# Altium PCB Dashboard.PcbDoc (part 1 of 2)
Units mil, origin at the board's own origin, x right, y up, seen from the top; angles counter-clockwise.
Board outline 4688.5 x 2701.18 mil, 2 copper layers (Top Layer, Bottom Layer); 92 components, 123 nets, 384 pads, 213 vias.
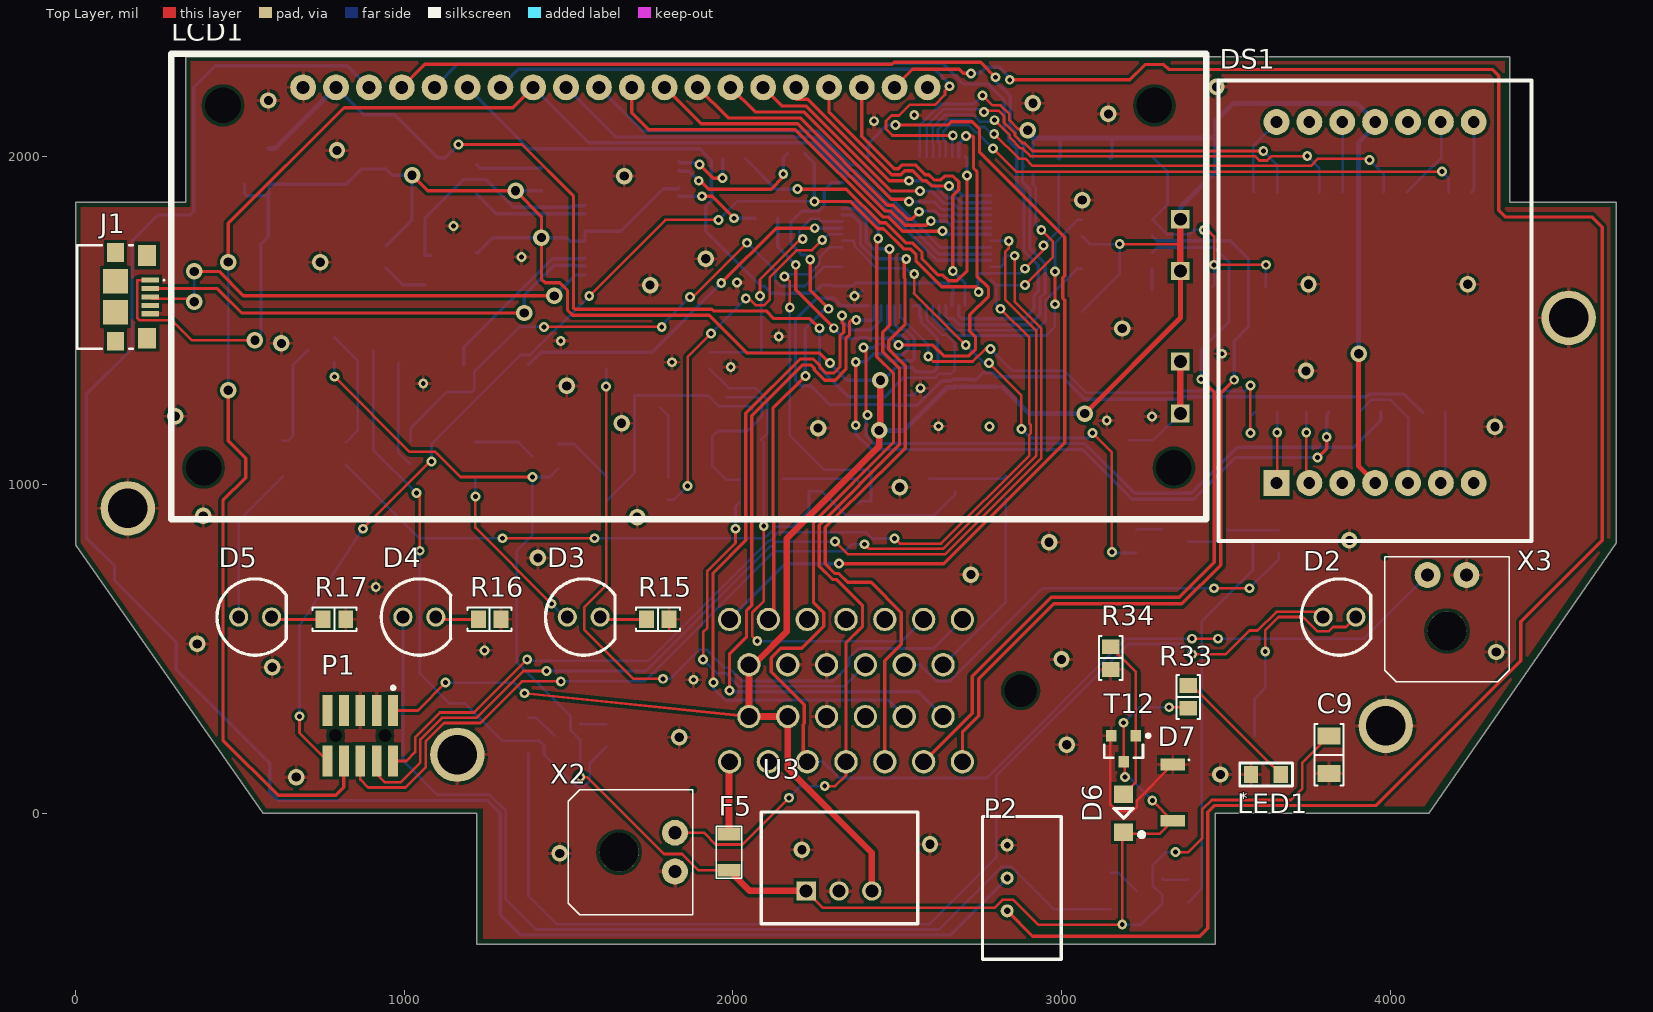
[diagram p0: Top Layer view]
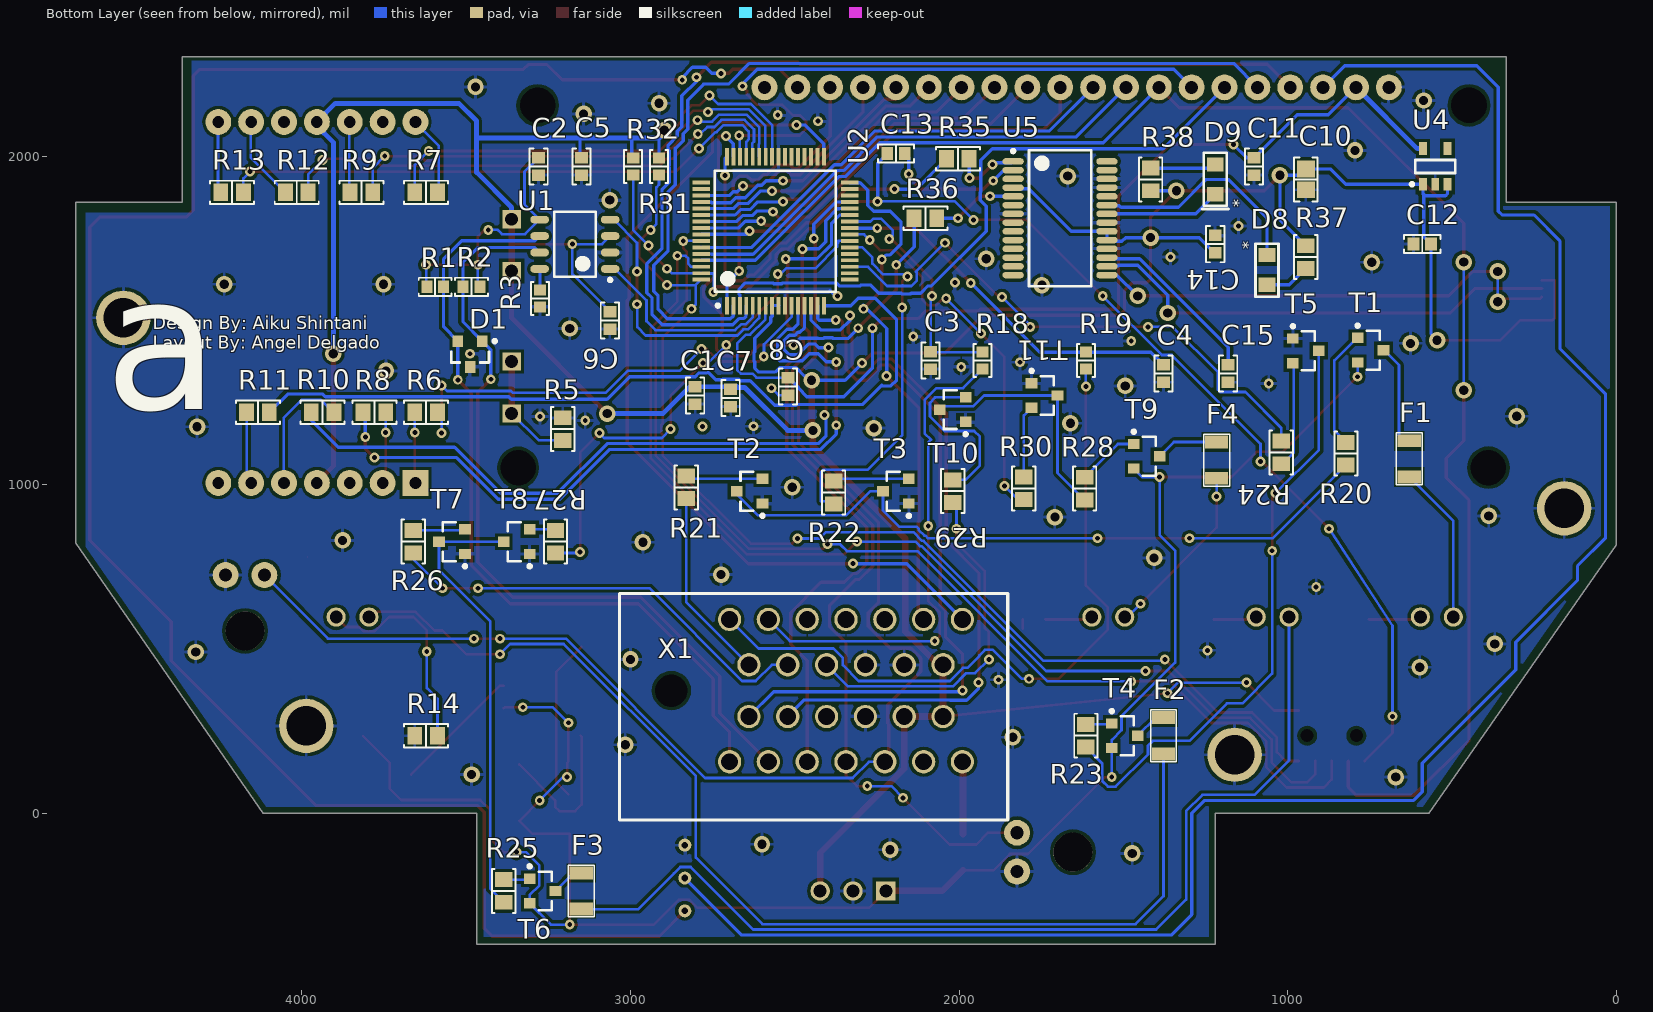
[diagram p1: Bottom Layer view, seen from below]
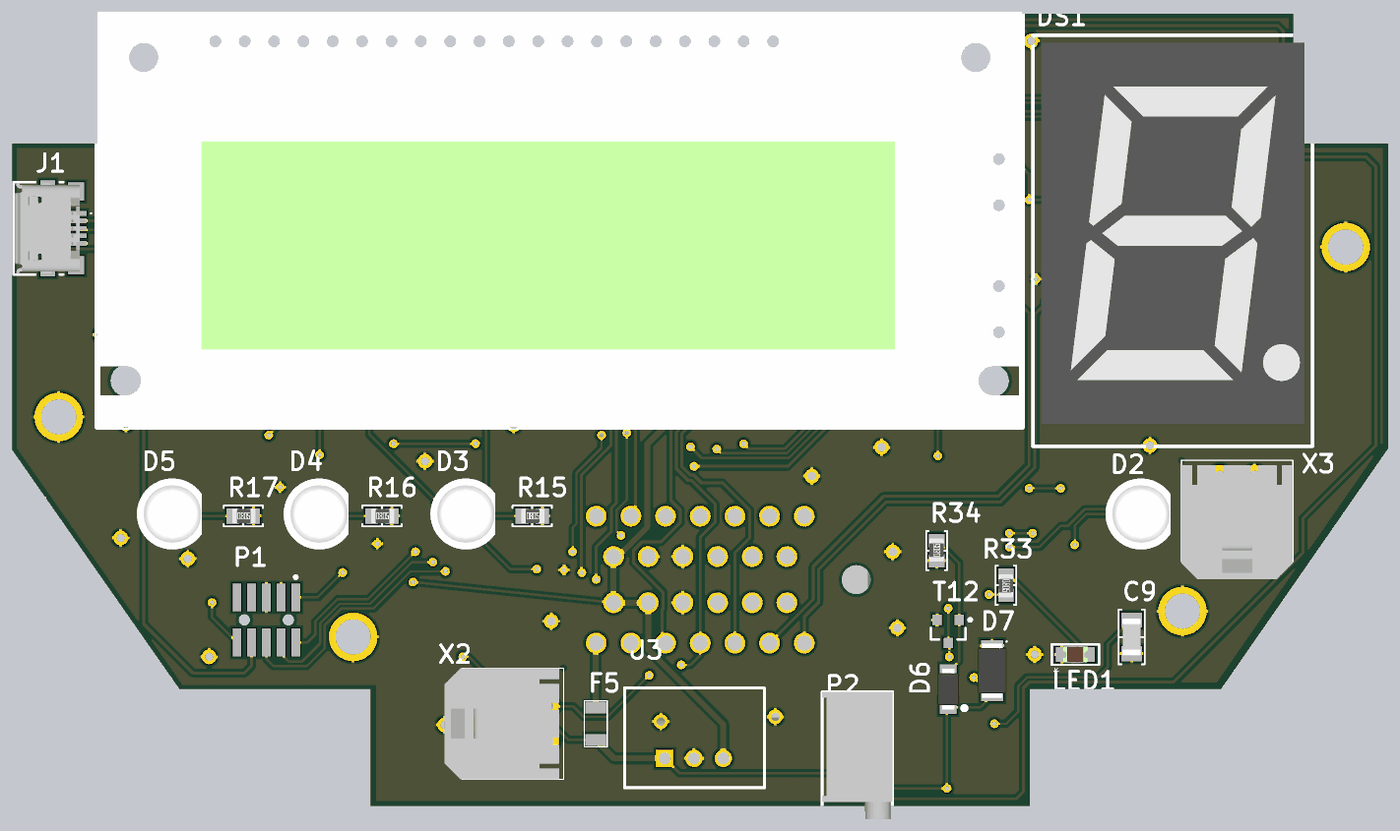
[diagram p3: 3D render of the assembled board from above, using the file's embedded part models]
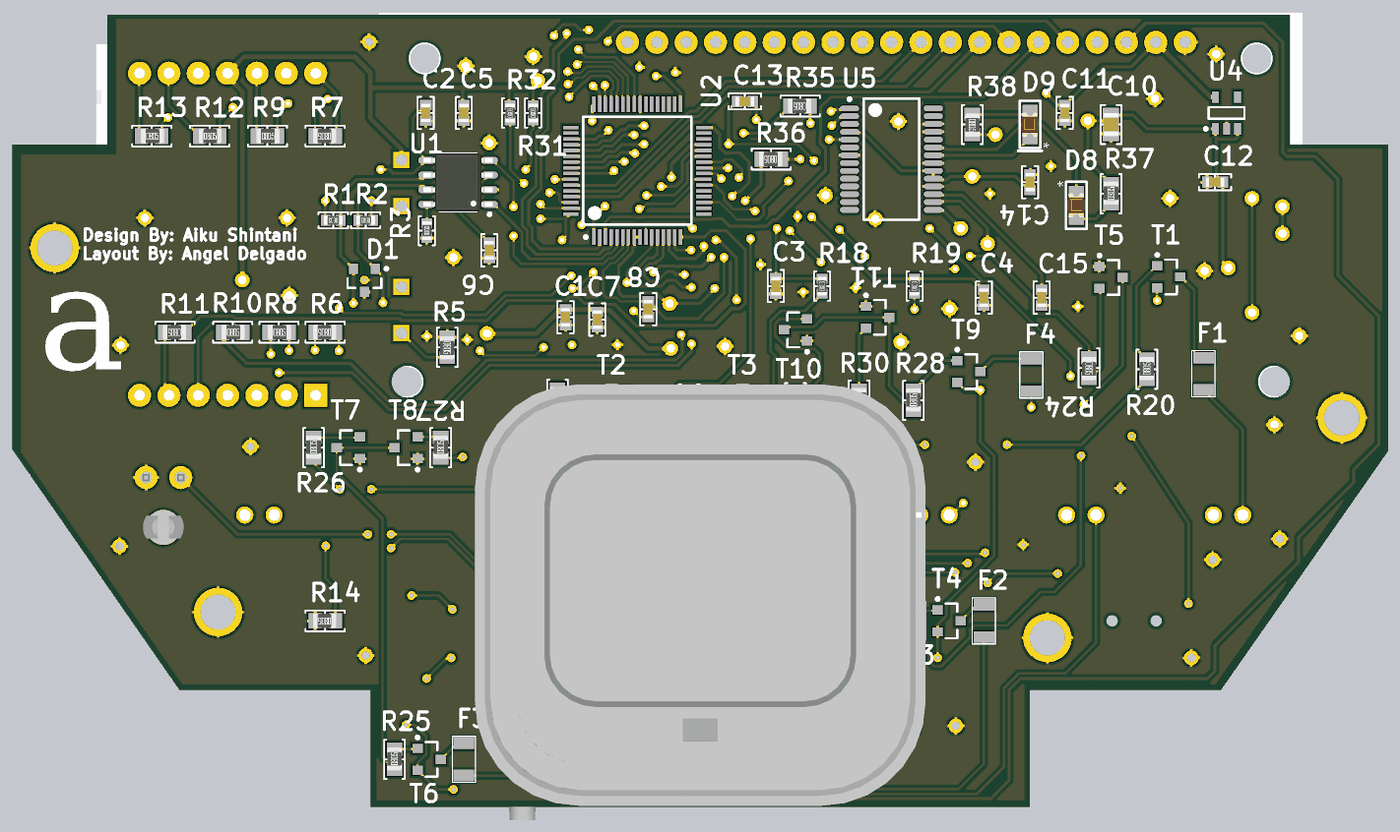
[diagram p4: 3D render of the assembled board from below, using the file's embedded part models]

## Layer stack, top to bottom
Top Solder: solder mask 0.4, Solder Resist, Dk 3.5
Top Layer: signal copper 1.4
Dielectric 1: dielectric 12.6, FR-4, Dk 4.8
Bottom Layer: signal copper 1.4
Bottom Solder: solder mask 0.4, Solder Resist, Dk 3.5

## Board outline
1220.87,0 1220.87,-398.03 3467.72,-398.03 3467.72,0 4117.8,0 4688.5,822.46 4688.5,1860.24 4364.17,1860.24 4364.17,2303.15 334.65,2303.15 334.65,1860.24 0,1860.24 0,816.93 570.87,0

## Design rules (kind name [scope] priority, off if disabled: settings)
Clearance [All] p1: gap=10 ignorepadtopadclearanceinfootprint=FALSE except(0: Arc-Hole Track-Hole SMDPad-Hole THPad-Hole Via-Hole Fill-Hole Poly-Hole Region-Hole Text-Hole; 6: SMDPad-SMDPad; 8: Arc-Arc Arc-Track Arc-SMDPad Track-Track Track-SMDPad)
ComponentClearance [All] p1: gap=10 collisioncheckmode=3 verticalgap=10 showdistances=TRUE
DiffPairsRouting [All] p1: maxlimit=10 minlimit=10 mostfreqgap=10 toplayer_minwidth=8 toplayer_maxwidth=15 toplayer_prefwidth=10 bottomlayer_minwidth=8 bottomlayer_maxwidth=15 bottomlayer_prefwidth=10 maxuncoupledlength=500
HoleSize [All] p1: absolutevalues=TRUE maxlimit=100 minlimit=10 maxpercent=80.000 minpercent=20.000
MatchedLengths "Schematic Matched Net Lengths_1" [InNet('CAN_N')] p1: tolerance=1000 checknetsindiffpair=FALSE checkdiffpairvsdiffpair=TRUE checkxsignals=TRUE checkothers=TRUE
MatchedLengths "Schematic Matched Net Lengths" [InNet('CAN_P')] p2: tolerance=1000 checknetsindiffpair=FALSE checkdiffpairvsdiffpair=TRUE checkxsignals=TRUE checkothers=TRUE
PolygonConnect [All] p1: connectstyle=Relief reliefconductorwidth=10 reliefentries=4 polygonreliefangle="90 Angle" airgapwidth=10
RoutingVias [All] p1: holewidth=28 width=50 viastyle="Through Hole" minholewidth=10 minwidth=10 maxholewidth=28 maxwidth=50
SolderMaskExpansion [All] p1: expansion=4
Width [All] p1: maxlimit=157.48 minlimit=8 preferedwidth=8 minimp=50.000000 maximp=50.000000 favimp=50.000000
27 further rules are at their usual default settings.

## Classes and differential pairs
component class USB: C13 C14 C15 D8 D9 J1 R35 R36 R37 R38 U5
component class U_RVP_OVP_LC: D6 D7 LED1 R33 R34 T12
component class U_Power: C9 C10 C11 C12 U3 U4
component class "U_High Side Drivers": F1 F2 F3 F4 R20 R21 R22 R23 R24 R25 R26 R27 R28 R29 R30 T1 T2 T3 T4 T5 T6 T7 T8 T9 T10 T11
component class U_DRS_POT_LPFs: C3 C4 R18 R19
component class U_CAN_Tranceiver: C1 C2 D1 R1 R2 R3 U1
component class MCU: C5 C6 C7 C8 P1 R31 R32 U2
component class MCU_System: F5
component class Dashboard: D2 D3 D4 D5 DS1 LCD1 P2 R5 R6 R7 R8 R9 R10 R11 R12 R13 R14 R15 R16 R17 X1 X2 X3
differential pair CAN: +CAN_P -CAN_N

## Components (designator, comment, footprint, x,y, rotation, side; value= is the part's Value field where it differs from the comment)
C1 "Capacitor MLCC 0.10uf 50V CAP 0603/1608" "CAP 0603/1608" 2803.15,1271.65 r90 bottom value=0.10uf
C2 "Capacitor MLCC 4700pf 50V CAP 0603/1608" "CAP 0603/1608" 3279.53,1968.5 r90 bottom value=4700pf
C3 "Capacitor MLCC 0.33uf 16V CAP 0603/1608" "CAP 0603/1608" 2086.61,1377.95 r90 bottom value=0.33uf (schematic designator C14)
C4 "Capacitor MLCC 0.33uf 16V CAP 0603/1608" "CAP 0603/1608" 1377.95,1338.58 r90 bottom value=0.33uf (schematic designator C15)
C5 "Capacitor MLCC 0.10uf 16V CAP 0603/1608" "CAP 0603/1608" 3149.61,1968.5 r90 bottom value=0.10uf (schematic designator C3)
C6 "Capacitor MLCC 0.10uf 25V CAP 0603/1608" "CAP 0603/1608" 3062.99,1500 r90 bottom value=0.10uf (schematic designator C4)
C7 "Capacitor MLCC 100pf 25V CAP 0603/1608" "CAP 0603/1608" 2695.15,1263.78 r90 bottom value=100pf (schematic designator C5)
C8 "Capacitor MLCC 0.10uf 25V CAP 0603/1608" "CAP 0603/1608" 2521.42,1299.21 r90 bottom value=0.10uf (schematic designator C6)
C9 "Capacitor MLCC 1.1pf 50V CAP 1206/3216" "CAP 1206/3216 - 1.8MM" 3813.98,178.15 r90 top value=10uf (schematic designator C7)
C10 "Capacitor MLCC 22uf 16V CAP 0805/2012" "CAP 0805/2012" 944.88,1929.13 r90 bottom value=22uf (schematic designator C8)
C11 "Capacitor MLCC 1.0uf 16V CAP 0603/1608" "CAP 0603/1608" 1102.36,1968.5 r90 bottom value=1.0uf (schematic designator C9)
C12 "Capacitor MLCC 1.0uf 16V CAP 0603/1608" "CAP 0603/1608" 590.55,1732.28 r180 bottom value=1.0uf (schematic designator C10)
C13 "Capacitor MLCC 0.10uf 25V CAP 0603/1608" "CAP 0603/1608" 2192.28,2007.87 r0 bottom value=0.10uf (schematic designator C11)
C14 "Capacitor MLCC 0.10uf 25V CAP 0603/1608" "CAP 0603/1608" 1220.47,1732.28 r270 bottom value=0.10uf (schematic designator C12)
C15 "Capacitor MLCC 0.10uf 25V CAP 0603/1608" "CAP 0603/1608" 1181.1,1338.58 r90 bottom value=0.10uf (schematic designator C13)
D1 "NUP1105LT1G" "SOT-23 (TO-236)" 3488.19,1397.64 r270 bottom value=TVS_24V
D2 "LED" "LED TH" 3845.98,597.36 r0 top locked value=Green
D3 "LED" "LED TH" 1545.98,597.36 r0 top locked value=Red
D4 "LED" "LED TH" 1045.98,597.36 r0 top locked value=Red
D5 "LED" "LED TH" 545.98,597.36 r0 top locked value=Red
D6 "DDZ9701-7" SOD123F 3188.98,0 r270 top value=14Vz
D7 "DIODE" SOD-128 3338.58,62.99 r270 top value=5A
D8 "" 0805_LED 1062.99,1653.54 r90 bottom value=Green
D9 "" 0805_LED 1220.47,1929.13 r270 bottom value=Red
DS1 "NAR105B" Stanley7Seg 3654.45,1005.51 r0 top locked
F1 "1A" "PTC Fuse 1206/3216" 629.92,1078.74 r90 bottom
F2 "1A" "PTC Fuse 1206/3216" 1377.95,236.22 r90 bottom
F3 "1A" "PTC Fuse 1206/3216" 3149.61,-236.22 r90 bottom
F4 "1A" "PTC Fuse 1206/3216" 1216.54,1074.8 r90 bottom
F5 "2.2A" "PTC Fuse 1206/3216" 1988.19,-118.11 r270 top
J1 "1981568-1" TECO-1981568-5_V 226.38,1571.54 r270 top value=CONN
LCD1 "" NHD-12232 3282.87,2154.33 r0 top locked value="LCD Display"
LED1 "" 0805_LED 3622.05,118.11 r180 top value=Green
P1 "5103309-1" HDR2X5_SMT 866.14,236.22 r180 top value=CONN
P2 "3299X-1-502LF" 3299X-1-502LF 2834.65,-196.85 r0 top value=5K
R1 "Resistor 62 0603 1/10W 5%" "RES 0603/1608" 3594.49,1602.36 r0 bottom value=62
R2 "Resistor 62 0603 1/10W 5%" "RES 0603/1608" 3484.25,1602.36 r0 bottom value=62
R3 "Resistor 100 0603 1/10W 10%" "RES 0603/1608" 3275.59,1566.93 r90 bottom value=100
R5 "Resistor 5.6 0805 1/2W 1%" "RES 0805/2012" 3206.24,1169.29 r270 bottom value=5.6
R6 "Resistor 82 0805 1/4W 5%" "RES 0805/2012" 3622.05,1220.47 r0 bottom value=82
R7 "Resistor 82 0805 1/4W 5%" "RES 0805/2012" 3622.05,1889.76 r0 bottom value=82
R8 "Resistor 82 0805 1/4W 5%" "RES 0805/2012" 3779.53,1220.47 r180 bottom value=82
R9 "Resistor 82 0805 1/4W 5%" "RES 0805/2012" 3818.9,1889.76 r180 bottom value=82
R10 "Resistor 82 0805 1/4W 5%" "RES 0805/2012" 3937.01,1220.47 r180 bottom value=82
R11 "Resistor 82 0805 1/4W 5%" "RES 0805/2012" 4133.86,1220.47 r0 bottom value=82
R12 "Resistor 82 0805 1/4W 5%" "RES 0805/2012" 4015.75,1889.76 r180 bottom value=82
R13 "Resistor 82 0805 1/4W 5%" "RES 0805/2012" 4212.6,1889.76 r180 bottom value=82
R14 "Resistor 330 0805 1/4W 5%" "RES 0805/2012" 3622.05,236.22 r0 bottom value=330
R15 "Resistor 1.0k 0805 1/4W 5%" "RES 0805/2012" 1771.65,590.55 r0 top value=1.0k
R16 "Resistor 1.0k 0805 1/4W 5%" "RES 0805/2012" 1259.84,590.55 r0 top value=1.0k
R17 "Resistor 1.0k 0805 1/4W 5%" "RES 0805/2012" 787.4,590.55 r0 top value=1.0k
R18 "Resistor 100k 0603 1/10W 1%" "RES 0603/1608" 1929.13,1377.95 r90 bottom value=100k (schematic designator R70)
R19 "Resistor 100k 0603 1/10W 1%" "RES 0603/1608" 1614.17,1377.95 r90 bottom value=100k (schematic designator R71)
R20 "Resistor 10k 0805 1/4W 5%" "RES 0805/2012" 822.83,1094.49 r90 bottom value=10k (schematic designator R18)
R21 "Resistor 120k 0805 1/4W 1%" "RES 0805/2012" 2830.71,992.13 r90 bottom value=120k (schematic designator R19)
R22 "Resistor 47k 0805 1/4W 1%" "RES 0805/2012" 2381.89,976.38 r90 bottom value=47k (schematic designator R20)
R23 "Resistor 10k 0805 1/4W 5%" "RES 0805/2012" 1614.17,236.22 r90 bottom value=10k (schematic designator R21)
R24 "Resistor 16k 0805 1/4W 1%" "RES 0805/2012" 1019.68,1098.43 r270 bottom value=16k (schematic designator R22)
R25 "Resistor 10k 0805 1/4W 5%" "RES 0805/2012" 3385.83,-236.22 r90 bottom value=10k (schematic designator R23)
R26 "Resistor 120k 0805 1/4W 1%" "RES 0805/2012" 3661.42,826.77 r90 bottom value=120k (schematic designator R24)
R27 "Resistor 47k 0805 1/4W 1%" "RES 0805/2012" 3228.35,826.77 r90 bottom value=47k (schematic designator R25)
R28 "Resistor 10k 0805 1/4W 5%" "RES 0805/2012" 1618.11,988.19 r90 bottom value=10k (schematic designator R26)
R29 "Resistor 120k 0805 1/4W 1%" "RES 0805/2012" 2019.68,980.31 r90 bottom value=120k (schematic designator R27)
R30 "Resistor 47k 0805 1/4W 1%" "RES 0805/2012" 1803.15,989.17 r90 bottom value=47k (schematic designator R28)
R31 "Resistor 10k 0603 1/10W 1%" "RES 0603/1608" 2913.39,1968.5 r90 bottom value=10k (schematic designator R29)
R32 "Resistor 10k 0603 1/10W 5%" "RES 0603/1608" 2992.13,1968.5 r90 bottom value=10k (schematic designator R30)
R33 "Resistor 470 0805 1/10W 1%" "RES 0805/2012" 3385.83,354.33 r270 top value=470 (schematic designator R64)
R34 "Resistor 47k 0805 1/10W 1%" "RES 0805/2012" 3149.61,472.44 r90 top value=47k (schematic designator R65)
R35 "Resistor 1.0k 0805 1/4W 1%" "RES 0805/2012" 2003.94,1992.13 r0 bottom value=1.0k (schematic designator R66)
R36 "Resistor 1.0k 0805 1/4W 1%" "RES 0805/2012" 2102.36,1811.02 r0 bottom value=1.0k (schematic designator R67)
R37 "Resistor 1.0k 0805 1/4W 1%" "RES 0805/2012" 944.88,1692.91 r90 bottom value=1.0k (schematic designator R68)
R38 "Resistor 1.0k 0805 1/4W 1%" "RES 0805/2012" 1417.32,1929.13 r270 bottom value=1.0k (schematic designator R69)
T1 "PNP Transistor" SOT23-3 748.03,1409.45 r180 bottom
T2 "NPN Transistor" SOT23-3 2637.8,980.31 r0 bottom
T3 "NPN Transistor" SOT23-3 2192.28,980.31 r0 bottom
T4 "PNP Transistor" SOT23-3 1496.06,236.22 r180 bottom
T5 "NPN Transistor" SOT23-3 944.88,1407.48 r180 bottom
T6 "PNP Transistor" SOT23-3 3267.72,-236.22 r180 bottom
T7 "NPN Transistor" SOT23-3 3543.31,826.77 r0 bottom
T8 "NPN Transistor" SOT23-3 3346.46,826.77 r0 bottom
T9 "PNP Transistor" SOT23-3 1429.13,1086.61 r180 bottom
T10 "NPN Transistor" SOT23-3 2019.68,1228.74 r0 bottom
T11 "NPN Transistor" SOT23-3 1740.16,1271.65 r180 bottom
T12 "SI3434-TP" SOT23-3 3188.98,196.85 r270 top value=N_Channel
U1 "MCP2561 CAN Transceiver" SOIC-8 3169.29,1731.77 r0 bottom value=CAN/UART
U2 "" TQFP64 2559.06,1771.65 r90 bottom
U3 "P78E05-1000" P78E05 2322.83,-236.22 r0 top value=Buck
U4 "LP5907-3.3 V LDO" SOT23-5 551.18,1968.5 r90 bottom value=5.5V
U5 "FT232RL" SSOP-28 1692.91,1811.02 r180 bottom
X1 "6437288-6" TE_Amp_6437288-6 2344.25,373.43 r270 bottom locked value=CONN
X2 "0436500200" "CONN 43650-0200 MOLEX 2PIN" 1653.54,-118.11 r270 top value=CONN
X3 "0436500200" "CONN 43650-0200 MOLEX 2PIN" 4173.23,555.12 r0 top value=CONN

## Footprints (in the part's own frame and the unit in brackets; to place one, negate y for a bottom-side part, rotate by r counter-clockwise, add the part's x,y. Pads: shape width x height; smd on the part's side, far side on the other; paste and mask are expansions set on the pad)
0805_LED [mm]
  rect 1.1x1.3 smd: 1(-1.15,0) 2(1.15,0)
  silkscreen extent -2.06,-0.89 2.03,0.89, body extent -1.05,-0.67 1.05,0.67, height 0.9
3299X-1-502LF [mm]
  round 1 hole 0.51: 1(0,-2.54) 2(0,0) 3(0,2.54)
  silkscreen extent -1.91,-6.29 4.19,4.76, body extent -1.91,-6.29 4.19,4.76, height 10.05
"CAP 0603/1608" [mm] "Chip Capacitor, 2-Leads, Body 1.60x0.80mm, IPC Medium Density"
  rect 0.9x1 smd: 1(-0.675,0) 2(0.675,0)
  silkscreen extent -1.4,-0.7 1.4,0.7, body extent -0.8,-0.41 0.8,0.41, height 0.82
"CAP 0805/2012" [mm] "Chip Capacitor, 2-Leads, Body 2.00x1.20mm, IPC Medium Density"
  rect 1.3x1.4 smd: 1(-0.8,0) 2(0.8,0)
  silkscreen extent -1.7,-0.9 1.7,0.9, body extent -1,-0.64 1,0.64, height 1.26
"CAP 1206/3216 - 1.8MM" [mm] "Chip Capacitor, 2-Leads, Body 3.25x1.60mm, IPC Medium Density"
  rect 1.3x1.8 smd: 1(-1.45,0) 2(1.45,0)
  silkscreen extent -2.37,-1.12 2.37,1.12, body extent -1.6,-0.8 1.6,0.8, height 1.8
"CONN 43650-0200 MOLEX 2PIN" [mm] "MOLEX-43650-0200, 2PIN"
  round 2 hole 1.02: 1(-1.5,4.32) 2(1.5,4.32)
  round 3 hole 3: MH(0,0)
  Top Layer lines w0.1: -4.822,5.713 -4.824,5.715
  silkscreen extent -4.82,-3.94 4.83,5.72, body extent -4.82,-4.58 4.83,5.32, height 5.62
HDR2X5_SMT [mm] "Header, 10-Leads, Body 3.43x6.35mm, Pitch 1.27mm"
  rect 0.76x2.4 smd: 1(-2.54,-1.95) 2(-2.54,1.95) 3(-1.27,-1.95) 4(-1.27,1.95) 5(0,-1.95) 6(0,1.95) 7(1.27,-1.95) 8(1.27,1.95) 9(2.54,-1.95) 10(2.54,1.95)
  round 0 hole 1 unplated: MH1(-1.905,0) MH2(1.905,0)
  silkscreen extent -2.67,-3.82 -2.42,-3.58, body extent -3.18,-1.72 3.18,1.72, height 4.55
"LED TH" [mm]
  round 1.48 hole 0.98: 1(-1.27,0) 2(1.27,0)
  silkscreen extent -2.95,-2.95 2.42,2.95, body extent -3,-3 2.5,3, height 8.8
NHD-12232 [mm]
  round 2 hole 1: 1(-65.8,1.4) 2(-63.26,1.4) 3(-60.72,1.4) 4(-58.18,1.4) 5(-55.64,1.4) 6(-53.1,1.4) 7(-50.56,1.4) 8(-48.02,1.4) 9(-45.48,1.4) 10(-42.94,1.4) 11(-40.4,1.4) 12(-37.86,1.4) 13(-35.32,1.4) 14(-32.78,1.4) 15(-30.24,1.4) 16(-27.7,1.4) 17(-25.16,1.4) 18(-22.62,1.4) 19(-20.08,1.4) 20(-17.54,1.4)
  round 0 hole 2.75 unplated: 21(-72,0) 22(0,0) 23(1.5,-28) 24(-73.5,-28)
  rect 1.4x1.4 hole 1: A(2,-8.8) A2(2,-12.8) K(2,-19.8) K2(2,-23.8)
  Top Layer lines w0.5: 2,-23.8 2,-19.8 ; 2,-12.8 2,-8.8
  silkscreen extent -76,-32 4,4, body extent -76,-32 4,4, height 13.25
P78E05 [mm]
  rect 1.5x1.5 hole 1: 1(-2.54,0)
  round 1.5 hole 1: 2(0,0) 3(2.54,0)
  silkscreen extent -6,-2.54 6.1,6.1, body extent -5.8,-5.08 6.8,7.9, height 10.4
"PTC Fuse 1206/3216" [mm]
  rect 1x1.8 smd: 1(-1.4,0) 2(1.4,0)
  silkscreen extent -2,-1 2,1, body extent -1.75,-1 1.75,1, height 1
"RES 0603/1608" [mm] "Chip Resistor, 2-Leads, Body 1.60x0.80mm, IPC Medium Density"
  rect 0.85x0.95 smd: 1(-0.65,0) 2(0.65,0)
  silkscreen extent -1.27,-0.7 1.27,0.7, body extent -0.8,-0.4 0.8,0.4, height 0.45
"RES 0805/2012" [mm] "Chip Resistor, 2-Leads, Body 2.00x1.25mm, IPC Medium Density"
  rect 1.15x1.35 smd: 1(-0.875,0) 2(0.875,0)
  silkscreen extent -1.7,-0.9 1.7,0.9, body extent -0.95,-0.62 1.05,0.63, height 0.6
SOD123F [mm] "SODFL, 2-Leads, Body 1.80x3.50mm, IPC Low Density"
  rect 1.35x1.45 smd: 1(-1.475,0) 2(1.475,0)
  silkscreen extent -0.38,-0.76 1.75,1.5, body extent -1.75,-0.95 1.75,0.95, height 1.15
SOD-128 [mm] "SOD-128, 2-Leads, Body 2.40x4.70mm, IPC Medium Density"
  rect 0.9x1.9 smd: 1(-2.175,0) 2(2.175,0)
  silkscreen extent -2.57,1.2 -2.48,1.3, body extent -2.35,-1.25 2.35,1.25, height 0.85
SOIC-8 [mm] "SOIC, 8-Leads, Body 4.90x3.90mm, Pitch 1.27mm, IPC Medium Density"
  oval 1.45x0.6 smd: 1(-2.725,1.905) 2(-2.725,0.635) 3(-2.725,-0.635) 4(-2.725,-1.905) 5(2.725,-1.905) 6(2.725,-0.635) 7(2.725,0.635) 8(2.725,1.905)
  silkscreen extent -2.85,-2.5 1.6,2.88, body extent -3,-2.5 3,2.5, height 1.75
SOT23-3 [mm] "SOT23, 3-Leads, Body 2.92x2.37mm, Pitch 0.95mm, IPC Medium Density, NUP2105L"
  rect 0.9x0.8 smd: 1(-1,0.95) 2(-1,-0.95) 3(1,0)
  silkscreen extent -1.13,-1.5 0.7,2.02, body extent -0.7,-1.52 0.7,1.52, height 1.11
SOT23-5 [mm] "SOT23, 5-Leads, Body 2.90x2.80mm, Pitch 0.95mm, IPC Medium Density, LP5907-3.3"
  rect 1x0.6 smd: 1(-1.375,0.95) 2(-1.375,0) 3(-1.375,-0.95) 4(1.375,-0.95) 5(1.375,0.95)
  silkscreen extent -1.5,-1.55 0.5,1.93, body extent -0.88,-1.52 0.87,1.53, height 1.45
"SOT-23 (TO-236)" [mm]
  rect 0.9x0.8 smd: 1(-1,0.95) 2(-1,-0.95) 3(1,0)
  silkscreen extent -1.12,-1.46 0.65,2.02, body extent -0.65,-1.46 0.65,1.46, height 1.11
SSOP-28 [mm] "SOP68P780X200-28N ,SOP, 28-Leads, Body 10.20x5.30mm, Pitch 0.68mm, IPC Medium Density, FT232RL"
  oval 1.65x0.5 smd: 1(-3.625,4.394) 2(-3.625,3.718) 3(-3.625,3.042) 4(-3.625,2.366) 5(-3.625,1.69) 6(-3.625,1.014) 7(-3.625,0.338) 8(-3.625,-0.338) 9(-3.625,-1.014) 10(-3.625,-1.69) 11(-3.625,-2.366) 12(-3.625,-3.042) 13(-3.625,-3.718) 14(-3.625,-4.394) 15(3.625,-4.394) 16(3.625,-3.718) 17(3.625,-3.042) 18(3.625,-2.366) 19(3.625,-1.69) 20(3.625,-1.014) 21(3.625,-0.338) 22(3.625,0.338) 23(3.625,1.014) 24(3.625,1.69) 25(3.625,2.366) 26(3.625,3.042) 27(3.625,3.718) 28(3.625,4.394)
  silkscreen extent -3.75,-5.25 2.4,5.32, body extent -2.8,-5.25 2.8,5.25, height 2
Stanley7Seg [mm]
  rect 2x2 hole 0.9: 1(0,0)
  round 2 hole 0.9: 2(2.54,0) 3(5.08,0) 4(7.62,0) 5(10.16,0) 6(12.7,0) 7(15.24,0) 8(15.24,27.9) 9(12.7,27.9) 10(10.16,27.9) 11(7.62,27.9) 12(5.08,27.9) 13(2.54,27.9) 14(0,27.9)
  silkscreen extent -4.5,-4.5 19.7,31.1, body extent -3.78,-2.55 19.02,30.45, height 9.01
TE_Amp_6437288-6 [mm] "TE_Amp_6437288-6"
  round 1.8 hole 1.3: 1(5.5,9) 2(5.5,6) 3(5.5,3) 4(5.5,0) 5(5.5,-3) 6(5.5,-6) 7(5.5,-9) 8(2,7.5) 9(2,4.5) 10(2,1.5) 11(2,-1.5) 12(2,-4.5) 13(2,-7.5) 14(-2,7.5) 15(-2,4.5) 16(-2,1.5) 17(-2,-1.5) 18(-2,-4.5) 19(-2,-7.5) 20(-5.5,9) 21(-5.5,6) 22(-5.5,3) 23(-5.5,0) 24(-5.5,-3) 25(-5.5,-6) 26(-5.5,-9)
  round 0 hole 2.5 unplated: 27(0,-13.5)
  silkscreen extent -7.5,-17.5 10,12.5, body extent -17,-19.5 19.5,19.5, height 24.71
TECO-1981568-5_V [mm] "SMD, 5-Leads, Body 8x5.9mm, Pitch 0.65mm"
  rect 0.4x1.35 smd: 1(-1.3,0) 2(-0.65,0) 3(0,0) 4(0.65,0) 5(1.3,0)
  rect 1.6x1.4 smd: 6(-3.2,-0.225) 7(3.2,-0.225)
  rect 1.45x1.3 smd: 8(-3.425,-2.675) 9(3.425,-2.675)
  rect 1.9x1.9 smd: 10(-1.2,-2.675) 11(1.2,-2.675)
  silkscreen extent -4,-5.63 4,1.12, body extent -4,-5.5 4,0.1, height 2.79
TQFP64 [mm] "TSQFP, 64-Leads, Body 10.00x10.00mm, Pitch 0.50mm, IPC Medium Density, MKE18F512VLH16"
  rect 1.35x0.3 smd: 1(-5.75,3.75) 2(-5.75,3.25) 3(-5.75,2.75) 4(-5.75,2.25) 5(-5.75,1.75) 6(-5.75,1.25) 7(-5.75,0.75) 8(-5.75,0.25) 9(-5.75,-0.25) 10(-5.75,-0.75) 11(-5.75,-1.25) 12(-5.75,-1.75) 13(-5.75,-2.25) 14(-5.75,-2.75) 15(-5.75,-3.25) 16(-5.75,-3.75) 33(5.75,-3.75) 34(5.75,-3.25) 35(5.75,-2.75) 36(5.75,-2.25) 37(5.75,-1.75) 38(5.75,-1.25) 39(5.75,-0.75) 40(5.75,-0.25) 41(5.75,0.25) 42(5.75,0.75) 43(5.75,1.25) 44(5.75,1.75) 45(5.75,2.25) 46(5.75,2.75) 47(5.75,3.25) 48(5.75,3.75)
  rect 0.3x1.35 smd: 17(-3.75,-5.75) 18(-3.25,-5.75) 19(-2.75,-5.75) 20(-2.25,-5.75) 21(-1.75,-5.75) 22(-1.25,-5.75) 23(-0.75,-5.75) 24(-0.25,-5.75) 25(0.25,-5.75) 26(0.75,-5.75) 27(1.25,-5.75) 28(1.75,-5.75) 29(2.25,-5.75) 30(2.75,-5.75) 31(3.25,-5.75) 32(3.75,-5.75) 49(3.75,5.75) 50(3.25,5.75) 51(2.75,5.75) 52(2.25,5.75) 53(1.75,5.75) 54(1.25,5.75) 55(0.75,5.75) 56(0.25,5.75) 57(-0.25,5.75) 58(-0.75,5.75) 59(-1.25,5.75) 60(-1.75,5.75) 61(-2.25,5.75) 62(-2.75,5.75) 63(-3.25,5.75) 64(-3.75,5.75)
  silkscreen extent -5.87,-4.67 4.67,4.68, body extent -5,-5 5,5, height 1.6

## Part data
C1: library part 943, Dielectric=Ceramic, Manufacturer_id=1, Package="CAP 0603/1608", Voltage_Rating=50V, Created_By="Nick Mah", Created_Date=10/20/2018, Drawer_id=1, idCapacitor=943, Name="Cap_0.10uf_50V_CAP 0603/1608"
C2: library part 929, Dielectric=Ceramic, Manufacturer_id=1, Package="CAP 0603/1608", Voltage_Rating=50V, Created_By="Nick Mah", Created_Date=10/20/2018, Drawer_id=1, idCapacitor=929, Name="Cap_4700pf_50V_CAP 0603/1608"
C3 C4: library part 226, Dielectric=Ceramic, Manufacturer_id=1, Package="CAP 0603/1608", Voltage_Rating=16V, Created_By="Nick Mah", Created_Date=10/20/2018, Drawer_id=1, idCapacitor=226, Name="Cap_0.33uf_16V_CAP 0603/1608"
C5: library part 223, Dielectric=Ceramic, Manufacturer_id=1, Package="CAP 0603/1608", Voltage_Rating=16V, Created_By="Nick Mah", Created_Date=10/20/2018, Drawer_id=1, idCapacitor=223, Name="Cap_0.10uf_16V_CAP 0603/1608"
C6 C8 C13 C14 C15: library part 583, Dielectric=Ceramic, Manufacturer_id=1, Package="CAP 0603/1608", Voltage_Rating=25V, Created_By="Nick Mah", Created_Date=10/20/2018, Drawer_id=1, idCapacitor=583, Name="Cap_0.10uf_25V_CAP 0603/1608"
C7: library part 529, Dielectric=Ceramic, Manufacturer_id=1, Package="CAP 0603/1608", Voltage_Rating=25V, Created_By="Nick Mah", Created_Date=10/20/2018, Drawer_id=1, idCapacitor=529, Name="Cap_100pf_25V_CAP 0603/1608"
C9: library part 1081, Dielectric=Ceramic, Manufacturer_id=1, Package="CAP 2106/3216", Voltage_Rating=50V, ComponentLink1Description=Datasheet, Created_By="Nick Mah", Drawer_id=1, ESR=Null, idCapacitor=1081, Name="Cap_10uf_50V_CAP 1206-3216"
C10: library part 357, Dielectric=Ceramic, Manufacturer_id=1, Package="CAP 0805/2012", Voltage_Rating=16V, Created_By="Nick Mah", Created_Date=10/20/2018, Drawer_id=1, idCapacitor=357, Name="Cap_22uf_16V_CAP 0805/2012"
C11 C12: library part 229, Dielectric=Ceramic, Manufacturer_id=1, Package="CAP 0603/1608", Voltage_Rating=16V, Created_By="Nick Mah", Created_Date=10/20/2018, Drawer_id=1, idCapacitor=229, Name="Cap_1.0uf_16V_CAP 0603/1608"
D1: library part 7, "ESD Protection Diode", Manufacturer_id=1, Package=SOT-23, Power=350W, Supplier1PartNo=NUP1105LT1GOSCT-ND, ComponentLink1URL=https://www.digikey.com/product-detail/en/on-semiconductor/NUP1105LT1G/NUP1105LT1GOSCT-ND/2122067, Drawer_id=1, Ic=8A, idDiode=7, Link=https://www.digikey.com/product-detail/en/on-semiconductor/NUP1105LT1G/NUP1105LT1GOSCT-ND/2122067, MfrPartNo=NUP1105LT1G, Name=SOT-23_350W_Zener, Num_Circuits=1, Supplier1=Digikey, Type=Zener
D2: library part 4, "LED GREEN DIFFUSED T/H", Manufacturer_id=1, MfrPartNo=LTL-10233W, Package=TH, Drawer_id=1, idLED=4, Link=https://www.digikey.com/products/en?mpart=LTL-10233W&v=160, Name=LED_TH_GREEN, Vf=2.1V
D3 D4 D5: library part 3, "LED RED DIFFUSED T/H", Manufacturer_id=1, MfrPartNo=LTL2R3KRD-EM, Package=TH, Brightness=50mcd, Drawer_id=1, Id=2mA, idLED=3, Link=https://www.digikey.com/products/en?mpart=LTL2R3KRD-EM&v=160, Name=LED_TH_RED, Vf=1.8V
D6: library part 10, "Zener Diode 14V 500mW ±5% Surface Mount SOD-123", Manufacturer_id=8, Package=SOD-123, Power=500mW, Supplier1PartNo=DDZ9701-7DICT-ND, ComponentLink1Description=Datasheet, ComponentLink1URL=https://www.diodes.com/assets/Datasheets/ds30410.pdf, Drawer_id=1, idDiode=10, Link=https://www.digikey.com/product-detail/en/diodes-incorporated/DDZ9701-7/DDZ9701-7DICT-ND/3877402, MfrPartNo=DDZ9701-7, Name=DDZ9701, Num_Circuits=1, Supplier1=Digi-Key, Type=Zener
D7: library part 12, "DIODE SCHOTTKY 30V 5A TMINIP2", Manufacturer_id=1, MfrPartNo=DB2431200L, Package=SOD-128, Power=30V, Supplier1PartNo=DB2431200LCT-ND, ComponentLink1Description=Datasheet, ComponentLink1URL=https://industrial.panasonic.com/content/data/SC/ds/ds4/DB2431200L_E.pdf, Drawer_id=1, Ic=5A, idDiode=12, Link=https://www.digikey.com/product-detail/en/panasonic-electronic-components/DB2431200L/DB2431200LCT-ND/3884430, Name=DB2431200L, Num_Circuits=1, Supplier1=Digi-Key, Type=Schottky
D8 LED1: library part 2, Manufacturer_id=1, Package=0805, Brightness=7mcd, Drawer_id=1, Id=20mA, idLED=2, Link=https://www.digikey.com/product-detail/en/visual-communications-company-vcc/CMD17-21VGD-TR8/L62505CT-ND/254936, Name=CMD17_0805_GREEN, Vf=2.1V
D9: library part 1, Package=0805, Drawer_id=1, idLED=1, Manufacturer_id=1, Name=LED_0805_RED, Vf=0.7V
DS1: library part 21, "Character LED Display Module Red 7-Segment 1 Character Common Anode 3.4V 20mA 1.299\" H x 0.898\" W x 0.354\" D (33.00mm x 22.80mm x 9.00mm) 14-DIP", Manufacturer_id=7, Package=DIP, Drawer_id=1, idIC_Misc=21, Link=https://www.digikey.com/product-detail/en/stanley-electric-co/NAR105B/404-1126-ND/428836, MfrPartNo=NAR105B, Name=7_Seg_Disp, Num_Circuits=1, Protocol=Multiplexed, Type="7 Segment", Vin(Max)=3.3V
F1 F2 F3 F4: library part 5, "Fuse", Manufacturer_id=1, MfrPartNo=1206L050/15YR, Created_By=Angel, Created_Date=10/27/2018, Drawer_id=1, I_hold=500mA, I_max=100A, I_trip=1A, idFuse=5, LatestRevisionDate=17-Jul-2002, LatestRevisionNote="Re-released for DXP Platform.", Link=https://www.digikey.com/product-detail/en/littelfuse-inc/1206L050-15YR/F3733CT-ND/2486168, Name="PTC Poly Fuse Resettable", PackageDescription="Thru-Hole; 2 Leads", PackageReference=PIN-W2/E2.8, Pd_Typ=600mW, Published=8-Jun-2000, Publisher="Altium Limited", V_max=15V
F5: library part 8, "Fuse", Manufacturer_id=1, MfrPartNo=1206L110/12SLYR, Drawer_id=1, I_hold=1.1A, I_max=50A, I_trip=2.2A, idFuse=8, LatestRevisionDate=17-Jul-2002, LatestRevisionNote="Re-released for DXP Platform.", Link=https://www.digikey.com/product-detail/en/littelfuse-inc/1206L110-12SLYR/F5764CT-ND/3593809, Name=Resettable, PackageDescription="Thru-Hole; 2 Leads", PackageReference=PIN-W2/E2.8, Pd_Typ=.8W, Published=8-Jun-2000, Publisher="Altium Limited", V_max=12V
J1: library part 5, "USB Micro Type B", Manufacturer_id=1, ComponentLink1Description=Datasheet, Created_By=Aiku, Created_Date=10/20/2018, Drawer_id=1, idConn=5, Link=https://www.mouser.com/ProductDetail/TE-Connectivity-AMP/1981568-1?qs=sGAEpiMZZMulM8LPOQ%252bykzEIUPbUCiSfqsfxH3Oq%252bYo%3d, MfrPartNo=1981568-1, Name="TE USB Micro", Num_Contacts=5, Supplier1=TE
LCD1: library part 22, Manufacturer_id=10, MfrPartNo=NHD-12232WG-EYYH-V#A-ND, ComponentLink1Description=Datasheet, ComponentLink1URL=http://www.newhavendisplay.com/specs/NHD-12232WG-EYYH-VA.pdf, Drawer_id=1, idIC_Misc=22, Name="NHD-12232 Display", Vin(Max)=3.3V, Vin(Min)=2.7V
P1: library part 4, "2 row connector", Manufacturer_id=1, Voltage_Rating=None, ComponentLink1Description=Datasheet, Created_By=Aiku, Drawer_id=1, idConn=4, Link=https://www.digikey.com/product-detail/en/5103309-1/A33160-ND/1114898?utm_campaign=buynow&WT.z_cid=ref_octopart_dkc_buynow&utm_medium=aggregator&curr=usd&site=us&utm_source=octopart, MfrPartNo=5103309-1, Name=CONN_TE_2X5POS, Num_Contacts=10, Num_Rows=2, Pitch=2.54mm
P2: library part 6, Manufacturer_id=1, ComponentLink1Description=Datasheet, Drawer_id=1, idTable=6, Link=https://www.digikey.com/product-detail/en/bourns-inc/3299X-1-502LF/3299X-502LF-ND/1088167, MfrPartNo=3299X-1-502LF, Name=3299X-1-502LF, Num_Contacts=3, Pitch=2.54mm
R1 R2: library part 1340, Manufacturer_id=1, Package=0603, Power=1/10W, Tolerance=5%, ComponentLink1Description=Datasheet, Created_By="Nick Mah", Created_Date=2018-10-20, Drawer_id=1, idResistor=1340, Name=Res_62_0603_1/10W_5%, Supplier 1=Digi-Key
R3: library part 2293, Manufacturer_id=1, Package=0603, Power=1/10W, Tolerance=10%, ComponentLink1Description=Datasheet, Created_By="Nick Mah", Created_Date=2018-10-20, Drawer_id=1, idResistor=2293, Name=Res_100_0603_1/10W_10%, Supplier 1=Digi-Key
R5: library part 883, Manufacturer_id=1, Package=0805, Power=1/2W, Tolerance=1%, ComponentLink1Description=Datasheet, Created_By="Nick Mah", Created_Date=2018-10-20, Drawer_id=1, idResistor=883, Name=Res_5.6_0805_1/2W_1%, Supplier 1=Digi-Key
R6 R7 R8 R9 R10 R11 R12 R13: library part 1775, Manufacturer_id=1, Package=0805, Power=1/4W, Tolerance=5%, ComponentLink1Description=Datasheet, Created_By="Nick Mah", Created_Date=2018-10-20, Drawer_id=1, idResistor=1775, Name=Res_82_0805_1/4W_5%, Supplier 1=Digi-Key
R14: library part 1789, Manufacturer_id=1, Package=0805, Power=1/4W, Tolerance=5%, ComponentLink1Description=Datasheet, Created_By="Nick Mah", Created_Date=2018-10-20, Drawer_id=1, idResistor=1789, Name=Res_330_0805_1/4W_5%, Supplier 1=Digi-Key
R15 R16 R17: library part 1801, Manufacturer_id=1, Package=0805, Power=1/4W, Tolerance=5%, ComponentLink1Description=Datasheet, Created_By="Nick Mah", Created_Date=2018-10-20, Drawer_id=1, idResistor=1801, Name=Res_1.0k_0805_1/4W_5%, Supplier 1=Digi-Key
R18 R19: library part 337, Manufacturer_id=1, Package=0603, Power=1/10W, Tolerance=1%, ComponentLink1Description=Datasheet, Created_By="Nick Mah", Created_Date=2018-10-20, Drawer_id=1, idResistor=337, Name=Res_100k_0603_1/10W_1%, Supplier 1=Digi-Key
R20 R23 R25 R28: library part 1825, Manufacturer_id=1, Package=0805, Power=1/4W, Tolerance=5%, ComponentLink1Description=Datasheet, Created_By="Nick Mah", Created_Date=2018-10-20, Drawer_id=1, idResistor=1825, Name=Res_10k_0805_1/4W_5%, Supplier 1=Digi-Key
R21 R26 R29: library part 771, Manufacturer_id=1, Package=0805, Power=1/4W, Tolerance=1%, ComponentLink1Description=Datasheet, Created_By="Nick Mah", Created_Date=2018-10-20, Drawer_id=1, idResistor=771, Name=Res_120k_0805_1/4W_1%, Supplier 1=Digi-Key
R22 R27 R30: library part 761, Manufacturer_id=1, Package=0805, Power=1/4W, Tolerance=1%, ComponentLink1Description=Datasheet, Created_By="Nick Mah", Created_Date=2018-10-20, Drawer_id=1, idResistor=761, Name=Res_47k_0805_1/4W_1%, Supplier 1=Digi-Key
R24: library part 750, Manufacturer_id=1, Package=0805, Power=1/4W, Tolerance=1%, ComponentLink1Description=Datasheet, Created_By="Nick Mah", Created_Date=2018-10-20, Drawer_id=1, idResistor=750, Name=Res_16k_0805_1/4W_1%, Supplier 1=Digi-Key
R31: library part 313, Manufacturer_id=1, Package=0603, Power=1/10W, Tolerance=1%, ComponentLink1Description=Datasheet, Created_By="Nick Mah", Created_Date=2018-10-20, Drawer_id=1, idResistor=313, Name=Res_10k_0603_1/10W_1%, Supplier 1=Digi-Key
R32: library part 1393, Manufacturer_id=1, Package=0603, Power=1/10W, Tolerance=5%, ComponentLink1Description=Datasheet, Created_By="Nick Mah", Created_Date=2018-10-20, Drawer_id=1, idResistor=1393, Name=Res_10k_0603_1/10W_5%, Supplier 1=Digi-Key
R33: library part 497, Manufacturer_id=1, Package=0805, Power=1/10W, Tolerance=1%, ComponentLink1Description=Datasheet, Created_By="Nick Mah", Created_Date=2018-10-20, Drawer_id=1, idResistor=497, Name=Res_470_0805_1/10W_1%, Supplier 1=Digi-Key
R34: library part 545, Manufacturer_id=1, Package=0805, Power=1/10W, Tolerance=1%, ComponentLink1Description=Datasheet, Created_By="Nick Mah", Created_Date=2018-10-20, Drawer_id=1, idResistor=545, Name=Res_47k_0805_1/10W_1%, Supplier 1=Digi-Key
R35 R36 R37 R38: library part 721, Manufacturer_id=1, Package=0805, Power=1/4W, Tolerance=1%, ComponentLink1Description=Datasheet, Created_By="Nick Mah", Created_Date=2018-10-20, Drawer_id=1, idResistor=721, Name=Res_1.0k_0805_1/4W_1%, Supplier 1=Digi-Key
T1 T4 T6 T9: library part 3, Manufacturer_id=1, MfrPartNo=MMBT4403WT1G, Package=SOT23-3, Created_By=Angel, Drawer_id=1, Ic=600mA, idBJT=3, Link=https://www.digikey.com/product-detail/en/on-semiconductor/MMBT4403WT1G/MMBT4403WT1GOSCT-ND/3487572, Name=MMBT4403WT1G, Num_Circuits=1, Type=PNP, Vce(Max)=-40V
T2 T3 T5 T7 T8 T10 T11: library part 2, Manufacturer_id=1, Drawer_id=1, idBJT=2, Name=MMBT4401, Type=NPN
T12: library part 6, "MOSFET N-CHANNEL 30V 5A SOT23", Manufacturer_id=1, Package=SOT-23, Created_By=Angel, Drawer_id=1, Id=5A, idFETs=6, Link=https://www.digikey.com/product-detail/en/micro-commercial-co/SI3434-TP/SI3434-TPMSCT-ND/7681700, MfrPartNo=SI3434-TP, Name=SI3434-TP, Num_Circuits=1, Rds_On=44Ohms, Supplier1=Digi-Key, Vdss=30V, Vgs(Max)=1V, Vgs(typ)=800mV
U1: library part 5, Manufacturer_id=1, MfrPartNo=MCP2561, Package=SOIC-8, Created_By="Angel Delgado", Data_Rate=1Mbps, Drawer_id=1, idIC_Interface=5, Link=https://www.digikey.com/product-detail/en/microchip-technology/MCP2561T-E-SN/MCP2561T-E-SNCT-ND/5148846, Name="CAN Transceiver", Num_Circuits=1, Protocol=CAN, Type=Transceiver, Vin(Max)=5.5V, Vin(Min)=4.5V
U2: library part 1, Drawer_id=1, idMCU=1, Manufacturer_id=1, Name="MKE18F512VLH16 MCU"
U3: library part 1, "Non-Isolated PoL Module DC DC Converter 1 Output 5V    1A 8V - 36V Input", Current_Rating=1A, Manufacturer_id=11, Package=3-SIP, Power=5W, Supplier1PartNo=102-5018-ND, ComponentLink1Description=Datasheet, ComponentLink1URL=https://www.cui.com/product/resource/p78e-1000.pdf, Created_By=Nick, Discrete=No, Drawer_id=1, Fs=520kHz, idPMIC_SW=1, Link=https://www.digikey.com/product-detail/en/cui-inc/P78E05-1000/102-5018-ND/9649654, MfrPartNo=P78E05-1000, Name="P78E05 5V Regulator", Num_Outputs=1, Supplier1=Digi-Key, Topology=Buck, Vin(Max)=36V, Vin(Min)=8V, Vout(Max)=5V, Vout(Min)=5V, Vout_Type=Fixed
U4: library part 4, Manufacturer_id=1, MfrPartNo=LP5907, Package=SOT23-5, Drawer_id=1, idPMIC_Lin=4, Name="LP5907 LDO", Vin(Max)=6V
U5: library part 3, Manufacturer_id=1, Created_By=Kyle, Drawer_id=1, idIC_Interface=3, Link=https://www.digikey.com/product-detail/en/ftdi-future-technology-devices-international-ltd/FT232RL-REEL/768-1007-1-ND/1836402, MfrPartNo=FT232RL, Name="USB FTDI", Protocol=UART, Vin(Max)=5.25, Vin(Min)=3.3
X1: library part 7, "Straight Angle 26Pos AMPSeal", Manufacturer_id=5, Supplier1PartNo=A123256-ND, Voltage_Rating=250V, ComponentLink1Description=Drawing, ComponentLink1URL=https://www.te.com/commerce/DocumentDelivery/DDEController?Action=srchrtrv&DocNm=1437288-6&DocType=Customer+Drawing&DocLang=JP, Created_By=Nick, Drawer_id=1, idConn=7, Link=https://www.digikey.com/product-detail/en/te-connectivity-amp-connectors/6437288-6/A123256-ND/2329274, MfrPartNo=6437288-6, Name="AMP SuperSeal Straight", Num_Contacts=26, Num_Rows=4, Pitch=3mm, Supplier1=Digi-Key
X2 X3: library part 9, Manufacturer_id=4, Supplier1PartNo=WM1860-ND, ComponentLink1Description=Datasheet, ComponentLink1URL=https://www.molex.com/pdm_docs/sd/436500200_sd.pdf, Created_By=Nick, Drawer_id=1, idConn=9, Link=https://www.digikey.com/product-detail/en/molex-llc/0436500200/WM1860-ND/268989, MfrPartNo=0436500200, Name="Molex 43650_0200", Num_Contacts=2, Num_Rows=1, Pitch="3 mm", Supplier1=Digi-Key

## Free pads (board coordinates)
  round 165.35 hole 120: MH(158.66,928.23) MH(1161.61,178.15) MH(3987.01,266.14) MH(4543.31,1507.87)

## Via types
v1: diameter 30, hole 15, Top Layer to Bottom Layer, 160 vias
v2: diameter 50, hole 28, Top Layer to Bottom Layer, 53 vias

## Nets (pads, with @x,y where several pads share a name; then routed paths per layer and width w, separated by ;. In a path a pad name is that pad's centre, name@x,y a point inside that pad or via, vN(x,y) a via of type N, cw(c..) or ccw(c..) an arc to the next point about the centre after c; other vN are vias at no path point)
3.3V: C8.2 C11.2 LCD1.2 U2.7 U4.5 | length 3135.6
  Top Layer w10: v1(1165.35,2035.43) 1358.27,2035.43 1514.69,1879.01 1514.69,1538.97 1519.68,1533.98 1935.87,1533.98 1941.05,1528.8 2101.73,1528.8 2124.83,1505.7 2234.46,1505.7 v1(2263.78,1476.38)
  Bottom Layer w8: C8.2@2523.32,1325.79 2616.86,1325.79 2629.14,1338.07 2664.2,1338.07 2675.28,1349.14 2675.28,1430.36 2648.94,1456.7 2635.74,1456.7 2590.36,1502.07 2590.36,1545.28 U2.7@2588.58,1545.28
  Bottom Layer w10: LCD1.2@792.28,2209.65 875.94,2125.98 971.46,2125.98 C11.2@1102.36,1995.08 1125,1995.08 v1(1165.35,2035.43) ; v1(2263.78,1476.38) 2263.78,1354.33 2350.39,1267.72 2463.35,1267.72 2488.73,1293.1 2488.73,1295.74 2518.78,1325.79 C8.2@2521.42,1325.79 C8.2@2523.32,1325.79 ; U2.7@2587.8,1544.5 U2.7@2588.58,1545.28
  Bottom Layer w15: U4.5@588.58,2022.64 605.28,2022.64 LCD1.2@792.28,2209.65
12V: C9.2 D6.2 D7.2 F5.2 R33.2 T1.2 T4.2 T6.2 T9.2 T12.3 U3.1 | length 5834.4
  Top Layer w8: v1(787.4,1328.74) 1016.28,1099.87 1094.69,1099.87 1170.93,1023.62 v1(1389.76,1023.62) ; v1(1535.43,110.24) 1556.18,110.24 1790.21,-123.8 1845.73,-123.8 1895.16,-173.23 F5.2@1988.19,-173.23 ; U3.1@2222.83,-236.22 2274.02,-287.4 2796.46,-287.4 2820.69,-263.17 2853.72,-263.17 2929.13,-338.58 v1(3185.04,-338.58) 3185.04,-62.01 3299.21,-62.01 D7.2@3338.58,-22.64 v1(3276.39,39.56) ; v1(3188.98,275.59) T12.3@3188.98,157.48 3192.91,153.54 v1(3192.91,110.24) ; v1(3327.8,322.83) 3382.87,322.83 R33.2@3385.83,319.88 ; v1(3346.46,-118.11) 3385.83,-118.11 3427.88,-76.06 3427.88,10.98 3457.53,40.62 3698.1,40.62 3732.28,74.8 3732.28,153.54 C9.2@3813.98,235.24
  Top Layer w20: F5.2@1988.19,-173.23 2051.18,-236.22 U3.1@2222.83,-236.22
  Bottom Layer w8: v1(787.4,1328.74) T1.2@787.4,1372.05 ; T9.2@1468.5,1049.21 1442.91,1023.62 v1(1389.76,1023.62) 1389.76,846.46 1342.52,799.21 1342.52,458.99 1505.72,295.79 1505.72,252.9 1535.43,223.19 T4.2@1535.43,198.82 v1(1535.43,110.24) ; v1(3185.04,-338.58) 3242.13,-338.58 T6.2@3307.09,-273.62 3307.09,-249.25 3277.37,-219.54 3277.37,-159.26 3318.52,-118.11 v1(3346.46,-118.11) ; v1(3188.98,275.59) 3236.22,322.83 v1(3327.8,322.83) ; v1(3192.91,110.24) 3205.71,110.24 v1(3276.39,39.56)
BMS_OK: R21.1 X1.19 | length 584.7
  Bottom Layer w8: X1.19@2639.53,452.17 2830.71,643.35 R21.1@2830.71,957.68
BMS_OK_MCU: R22.1 U2.22 | length 1125.3
  Top Layer w8: v1(2157.48,1633.86) 2173.23,1618.11 v1(2173.23,1539.37)
  Bottom Layer w8: v1(2157.48,1633.86) 2163.91,1640.29 2231.6,1640.29 2264.34,1673.03 2264.34,1692.24 2294.54,1722.44 U2.22@2332.68,1722.44 ; v1@2173.23,1527.56 2173.23,1150.59 2278.35,1045.46 2413.44,1045.46 2420.46,1038.44 2420.46,949.8 2389.76,949.8 R22.1@2381.89,941.93
BSPD_OK: R29.1 X1.17 | length 1077.9
  Top Layer w8: v1(1909.45,468.5) 1909.45,551.18 1922.49,564.22 1922.49,737.64 2007.87,823.03 v1(2007.87,866.14)
  Bottom Layer w8: v1(1909.45,468.5) 1951.31,426.64 1978.31,426.64 2018.22,386.73 2337.87,386.73 X1.17@2403.31,452.17 ; v1(2007.87,866.14) 2007.87,934.06 R29.1@2019.68,945.87
BSPD_OK_MCU: R30.1 U2.24 | length 1152.5
  Top Layer w8: v1(1862.2,996.06) 1862.2,1389.02 v1(1933.07,1459.88) ; v1(2039.37,1566.93) v1@2049.54,1566.93 ; v1@2049.54,1566.93 2070.67,1545.8 2094.69,1545.8 2111.68,1562.79 2111.68,1630.64 2195.07,1714.04 2241.49,1714.04 v1(2271.94,1744.49)
  Bottom Layer w8: R30.1@1803.15,954.72 1820.87,954.72 v1(1862.2,996.06) ; v1(1933.07,1459.88) 2039.37,1566.18 v1(2039.37,1566.93) v1@2040.11,1566.93 ; v1(2271.94,1744.49) 2289.26,1761.81 U2.24@2332.68,1761.81
CAN_N: D1.2 R1.1 U1.6 X1.7 | length 2440.3
  Top Layer w10: X1.7@2698.58,156.89 2698.58,246.72 2748.35,296.48 2748.35,409.04 2976.79,637.48 3366.55,637.48 3484.57,755.5 3484.57,1278.33 v1(3525.59,1319.35)
  Bottom Layer w10: U1.6@3276.57,1756.77 3291.22,1742.13 3514.06,1742.13 3568.9,1687.29 R1.1@3568.9,1602.36 3568.9,1480.32 D1.2@3525.59,1437.01 v1(3525.59,1319.35)
CAN_P: D1.1 R2.2 U1.7 X1.6 | length 2424.2
  Top Layer w10: X1.6@2580.47,156.89 2728.35,304.76 2728.35,417.32 2968.5,657.48 3358.27,657.48 3464.57,763.78 3464.57,1281.7 v1(3425.2,1321.07)
  Bottom Layer w10: U1.7@3276.57,1706.77 3291.46,1721.66 3465.63,1721.66 3509.84,1677.45 R2.2@3509.84,1602.36 3509.84,1496.06 D1.1@3450.79,1437.01 3425.2,1411.42 v1(3425.2,1321.07)
CAN_UART_RX: U1.4 U2.6 | length 796.1
  Top Layer w8: v1(2980.32,1549.21) v1@2980.32,1634.58
  Bottom Layer w8: U2.6@2608.27,1545.28 2608.27,1506.8 2642.36,1472.7 2656.28,1472.7 2674.78,1454.2 2954.2,1454.2 2979.33,1479.33 2979.33,1548.23 v1(2980.32,1549.21) ; v1(2980.32,1648.46) 2980.32,1736.22 3050.87,1806.77 U1.4@3062.01,1806.77
CAN_UART_TX: U1.1 U2.5 | length 600.5
  Bottom Layer w8: U2.5@2627.95,1545.28 2627.95,1509.74 2648.99,1488.7 2662.91,1488.7 2681.41,1470.2 2923.94,1470.2 2951.32,1497.57 2951.32,1561.22 3046.86,1656.77 U1.1@3062.01,1656.77
Cathode_a: R12.2 U2.44 | length 1603
  Top Layer w8: v1(2795.27,2066.93) 2870.07,1992.13 2890.76,1992.13 2912.14,1970.75 3759.04,1970.75 3780.41,1992.13 3929.13,1992.13 3937.01,1984.25 v1(3937.01,1988.19)
  Bottom Layer w8: U2.44@2627.95,1998.03 2629.73,1998.03 2629.73,2038.9 2624.29,2044.35 2624.29,2081.63 2653.15,2110.49 2723.5,2110.49 2745.13,2088.85 2766.12,2088.85 2788.05,2066.93 v1(2795.27,2066.93) ; v1(3937.01,1988.19) 3981.3,1943.9 R12.2@3981.3,1889.76
Cathode_b: R13.2 U2.45 | length 1735.5
  Top Layer w8: v1(2791.34,2023.62) 2862.2,1952.76 v1(4157.48,1952.76)
  Bottom Layer w8: U2.45@2647.64,1998.03 2647.64,2043.62 2640.29,2050.98 2640.29,2075 2659.77,2094.49 2716.87,2094.49 2738.51,2072.85 2742.11,2072.85 v1(2791.34,2023.62) ; v1(4157.48,1952.76) 4178.15,1932.09 R13.2@4178.15,1889.76
Cathode_c: R10.1 U2.13 | length 2372.6
  Top Layer w10: v1(2397.63,1417.32) 2400.31,1417.32 2404.88,1412.75 2404.88,1221.73 2414.01,1212.6 v1(2409.45,1212.6)
  Bottom Layer w10: v1(2397.63,1417.32) 2426.88,1417.32 2437.64,1428.08 2458.62,1428.08 2491.51,1395.19 2516.36,1395.19 2533.93,1412.77 2533.93,1437.62 2516.36,1455.19 2499.39,1455.19 2490.5,1464.08 2484.74,1464.08 2470.47,1478.35 U2.13@2470.47,1545.28 ; v1(2409.45,1212.6) 2404.88,1208.03 2404.88,1148.79 2428.31,1125.35 3071.38,1125.35 3222.71,974.02 3395.42,974.02 3535.57,1114.17 3889.76,1114.17 3971.46,1195.87 R10.1@3971.46,1220.47
Cathode_d: R8.1 U2.12 | length 2297.1
  Top Layer w10: v1(2374.01,1181.11) v1(2374.01,1374.01) ; v1(3779.53,1082.68) 3807.09,1110.24 v1@3807.09,1133.86
  Bottom Layer w10: v1(2374.01,1181.11) 2374.01,1154.2 2420.86,1107.35 3063.92,1107.35 3215.25,956.02 3402.87,956.02 3529.53,1082.68 v1(3779.53,1082.68) ; v1(2374.01,1374.01) 2404.06,1374.01 2428.31,1398.27 2455.93,1398.27 2477,1377.19 2546.21,1377.19 2551.93,1382.91 2551.93,1445.08 2523.81,1473.19 2506.84,1473.19 2490.16,1489.88 U2.12@2490.16,1545.28 ; v1(3807.09,1145.67) 3807.09,1213.58 R8.1@3813.98,1220.47
Cathode_DP: R11.1 U2.16 | length 2490.6
  Bottom Layer w10: U2.16@2411.42,1545.28 2410.94,1544.8 2329.99,1544.8 2307.01,1567.78 2255.8,1567.78 2190.47,1502.45 2190.47,1318.28 2208.04,1300.71 2232.89,1300.71 2235.34,1303.15 2294.39,1244.09 2494.17,1244.09 2496.35,1241.92 2561.63,1241.92 2601.09,1281.38 ; 2601.09,1281.39 2636.1,1316.4 2665.41,1316.4 2670.08,1321.07 2720.22,1321.07 2721.93,1319.35 2740.61,1319.35 2762.59,1341.33 2765.85,1341.33 2767.1,1340.08 2791.95,1340.08 2803.09,1328.94 3002.43,1328.94 3071.53,1259.84 3327.57,1259.84 3327.8,1260.08 3362.26,1260.08 3369.9,1267.72 3928.48,1267.72 3936.81,1276.05 4043.83,1276.05 R11.1@4099.41,1220.47
Cathode_e: R6.1 U2.11 | length 1455
  Top Layer w8: v1(2594.49,1389.76) 2609.25,1375 2729.75,1375 2768.14,1413.39 v1(2783.46,1413.39) ; v1@3574.8,1165.35 v1(3574.8,1302.35)
  Bottom Layer w8: U2.11@2509.84,1545.28 2509.84,1511.21 2593.84,1427.21 v1@2593.84,1397.64 ; v1(2783.46,1413.39) 2850.39,1346.46 3008.96,1346.46 3075.89,1279.53 3357.67,1279.53 3363.57,1285.43 3557.88,1285.43 v1(3574.8,1302.35) ; v1(3574.8,1157.48) 3574.8,1207.68 R6.1@3587.6,1220.47
Cathode_f: R9.2 U2.43 | length 1446.3
  Top Layer w8: v1(2796.07,2109.44) 2842.64,2062.87 2842.64,2056.16 2874.86,2023.94 2881.57,2023.94 2905.76,1999.75 3589.16,1999.75 3602.16,1986.75 3626.19,1986.75 3639.44,2000 3748.03,2000 v1(3748.03,2000.76)
  Bottom Layer w8: U2.43@2608.27,1998.03 2610.05,1998.03 2610.05,2035.96 2608.29,2037.72 2608.29,2088.25 2646.52,2126.49 2730.13,2126.49 2751.76,2104.85 2791.48,2104.85 v1(2796.07,2109.44) ; v1(3748.03,2000.76) 3784.45,1964.34 R9.2@3784.45,1889.76
Cathode_g: R7.2 U2.42 | length 1354.5
  Top Layer w8: v1(2763.77,2133.85) 2768.36,2138.44 2808.08,2138.44 2825.07,2121.45 2825.07,2103.07 2858.64,2069.5 2858.64,2062.78 2881.48,2039.94 2888.2,2039.94 2912.39,2015.75 v1(3614.17,2015.75)
  Bottom Layer w8: U2.42@2588.58,1998.03 2590.36,1999.81 2590.36,2092.96 2639.89,2142.49 2755.14,2142.49 v1(2763.77,2133.85) ; v1(3614.17,2015.75) 3656.5,1973.43 R7.2@3656.5,1889.76
CL: LCD1.7 U2.46 | length 1965.1
  Top Layer w8: v1(2659.35,2212.6) 2645.69,2198.94 2645.69,2187.34 2614.43,2156.08 2570.22,2156.08 2570.02,2156.28 2538.17,2156.28 2505.38,2123.49 2482.79,2123.49 2465.81,2106.5 2465.81,2082.48 2485.29,2062.99 v1(2669.29,2062.99)
  Bottom Layer w8: U2.46@2667.32,1998.03 2667.32,2061.02 v1(2669.29,2062.99)
  Bottom Layer w10: LCD1.7@1292.28,2209.65 1346.65,2264.02 2614.8,2264.02 v1@2667.32,2211.5
CS1: LCD1.5 U2.2 | length 2771.6
  Bottom Layer w10: LCD1.5@1092.28,2209.65 1164.65,2282.02 2638.19,2282.02 2700.35,2219.86 2776.9,2219.86 2780.79,2215.97 2826.07,2170.69 2826.07,2082.1 2839.64,2068.54 2839.64,2046.72 2862.69,2023.67 2863.68,2023.67 2863.68,1913.34 2886.26,1890.77 2886.26,1710.65 2929.13,1667.78 2929.13,1588.54 2916.32,1575.72 2916.32,1533.44 2888.07,1505.2 2695.91,1505.2 2687.79,1513.32 2687.79,1544.5 U2.2@2687.01,1545.28
CS2: LCD1.6 U2.3 | length 1967.1
  Bottom Layer w10: LCD1.6@1192.28,2209.65 1379.37,2022.56 1898.7,2022.56 1933.85,1987.41 1933.85,1892.04 1935.51,1890.38 1935.51,1865.53 1917.32,1847.34 1917.32,1771.65 2084.17,1604.8 2095.1,1604.8 2117.23,1582.68 2146.55,1582.68 2148.99,1580.24 2173.84,1580.24 2176.28,1582.68 2245.24,1582.68 2270.68,1608.11 2297.72,1608.11 2300.72,1605.11 2364.64,1605.11 2373.7,1614.17 2537.06,1614.17 2539.51,1611.73 2564.36,1611.73 2566.8,1614.17 2650.29,1614.17 2669.89,1594.57 2669.89,1579.65 2666.54,1576.3 2666.54,1546.06 U2.3@2667.32,1545.28
D_N: J1.2 U5.16 | length 1448.6
  Top Layer w10: J1.2@226.38,1597.13 430.43,1597.13 504.92,1522.64 v2(1365.16,1522.64)
  Bottom Layer w10: v2(1365.16,1522.64) 1365.16,1576.38 1456.69,1667.91 1515.77,1667.91 1515.77,1666.42 1548.43,1666.42 U5.16@1550.2,1664.65